# EAGLE board connectorvAudio (EAGLE 5.11)
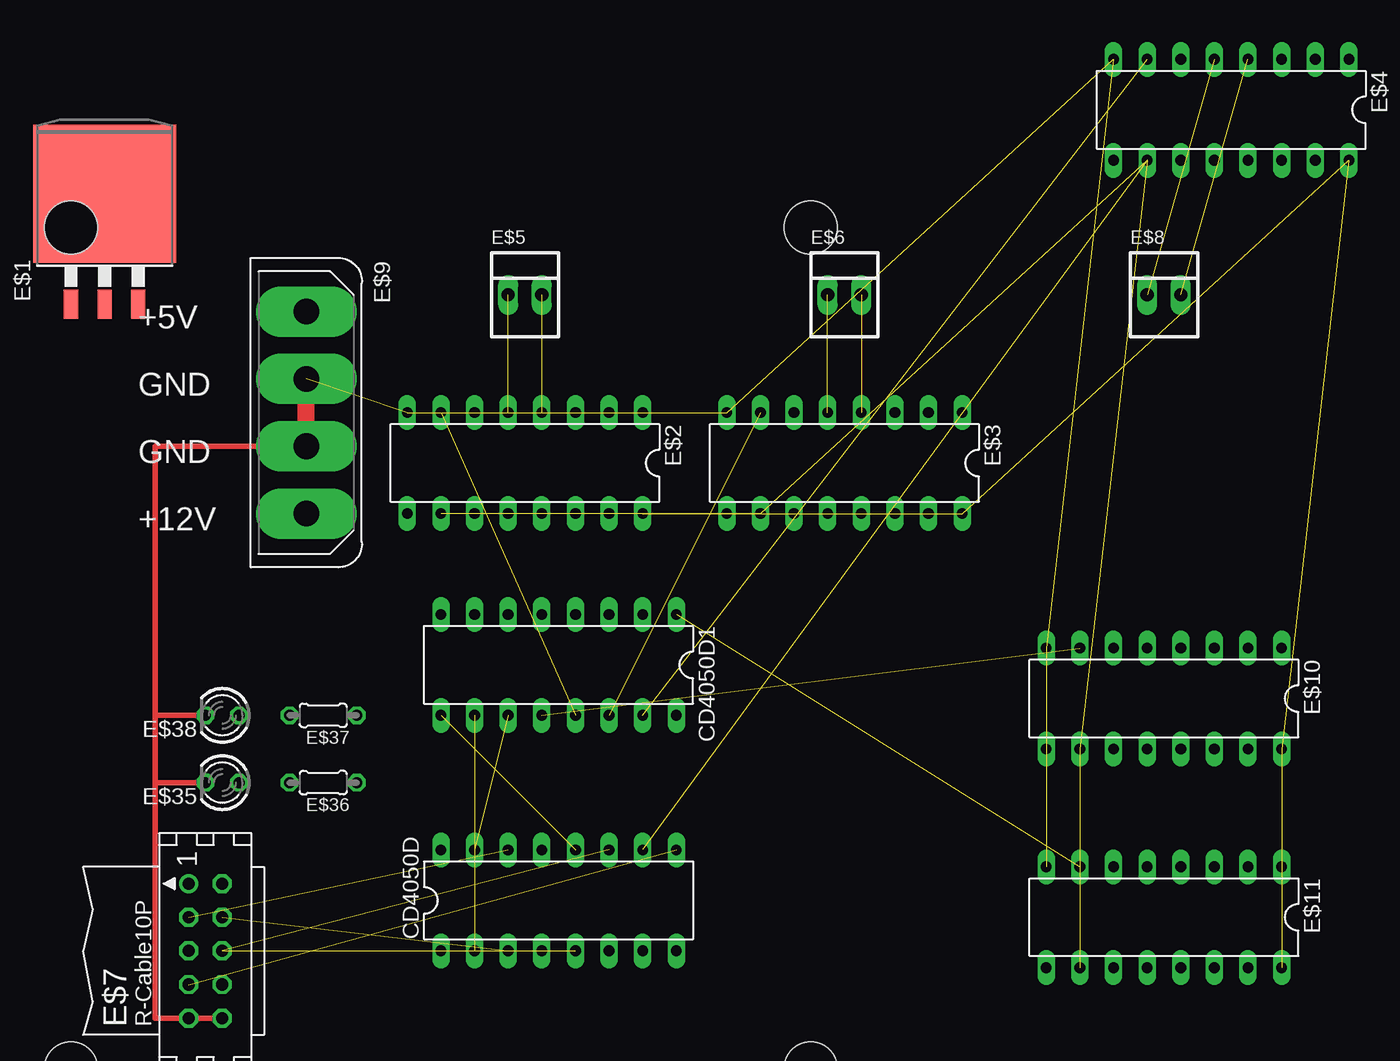
[diagram p0: board, top side]
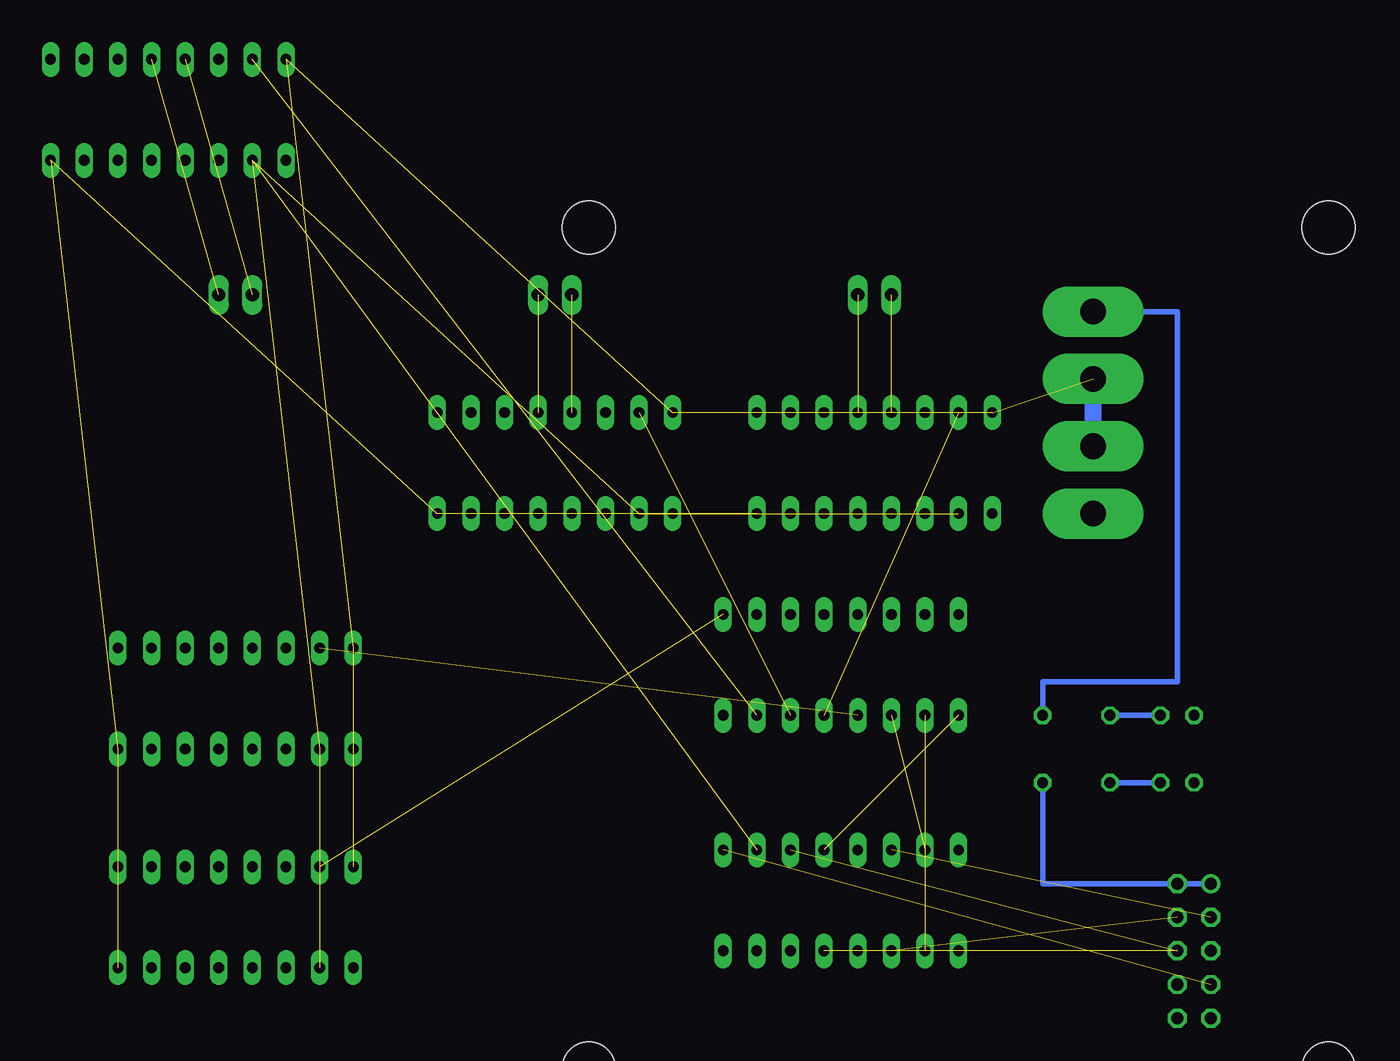
[diagram p1: board, bottom side, seen from below]

No outline drawn. Coordinates in mm, seen from the top.
Copper layers (1*16): Top 0.035mm / dielectric 1.5mm / Bottom 0.035mm
Design rules "default": minimum track width 10mil, minimum drill 24mil, track to track 8mil, track to pad 8mil, pad to pad 8mil, via to via 8mil, smd to smd 8mil, copper to edge 40mil, drill to drill 8mil, minimum pad ring 10mil, minimum via ring 8mil, stop-mask expansion 4mil, vias tented up to drill 0mil, thermal gap 10mil
Net classes: 1 Power: width 0.003 mm
Holes 4 mm at 59.69,67.31 59.69,3.81 3.81,3.81 3.81,67.31
vRestrict: area 0,0 to 63.5,71.1

## Footprints (pad centres in the part's own frame; a part is rotated, then mirrored left to right if it is on the bottom)
DIL16 = drill 0.813 long: 1 -8.89,-3.81; 2 -6.35,-3.81; 3 -3.81,-3.81; 4 -1.27,-3.81; 5 1.27,-3.81; 6 3.81,-3.81; 7 6.35,-3.81; 8 8.89,-3.81; 9 8.89,3.81; 10 6.35,3.81; 11 3.81,3.81; 12 1.27,3.81; 13 -1.27,3.81; 14 -3.81,3.81; 15 -6.35,3.81; 16 -8.89,3.81
TO263-3 = smd 1.067 x 2.159: 1 -2.54,-5.791; 2 0,-5.791; 3 2.54,-5.791 | smd 10.8 x 10.41: TAB 0,2.54
22-23-2021 = drill 1 long: 1 -1.27,0; 2 1.27,0
CON10L = drill 0.914 round: 1 5.08,1.27 | drill 0.914 octagon: 2 5.08,-1.27; 3 2.54,1.27; 4 2.54,-1.27; 5 0,1.27; 6 0,-1.27; 7 -2.54,1.27; 8 -2.54,-1.27; 9 -5.08,1.27; 10 -5.08,-1.27
FLOPPY-4 = drill 1.93 pad 3.81 long: 1 7.62,0; 2 2.54,0; 3 -2.54,0; 4 -7.62,0
LED3MM = drill 0.813 octagon: A -1.27,0; K 1.27,0
0204/5 = drill 0.813 octagon: 1 -2.54,0; 2 2.54,0

## Placement (x,y rotation side)
CD4050D  CD4050D  [DIL16]  40.64,16.51 0 top
CD4050D1  MC14051BCP  [DIL16]  40.64,34.29 180 top
E$1  LM3940IS-3.3  [TO263-3]  6.35,67.31 0 top
E$2  [DIL16]  38.1,49.53 180 top
E$3  [DIL16]  62.23,49.53 180 top
E$4  [DIL16]  91.44,76.2 180 top
E$5  [22-23-2021]  38.1,62.23 0 top
E$6  [22-23-2021]  62.23,62.23 0 top
E$7  [CON10L]  13.97,12.7 90 top
E$8  [22-23-2021]  86.36,62.23 0 top
E$9  [FLOPPY-4]  21.59,53.34 270 top
E$10  [DIL16]  86.36,31.75 180 top
E$11  [DIL16]  86.36,15.24 180 top
E$35  [LED3MM]  15.24,25.4 180 top
E$36  1k  [0204/5]  22.86,25.4 180 top
E$37  1k  [0204/5]  22.86,30.48 180 top
E$38  [LED3MM]  15.24,30.48 180 top

## Library data of the parts
CD4050D CD4050D1 E$2-E$4 E$10 E$11 = 40xx
E$1 = linear
E$5 E$6 E$8 = con-molex
E$7 = con-harting
E$9 = con-amp
E$35 E$38 = led
E$36 E$37 = rcl

## Nets
S$1: CD4050D.14 E$7.3
S$2: CD4050D.3 E$7.4
S$3 [Power]: E$9.4 E$37.1
S$4: CD4050D1.11 CD4050D.15
S$5: CD4050D.5 CD4050D.11 E$7.6
S$6: CD4050D.9 E$7.7
S$7: CD4050D1.10 CD4050D.2
S$8: CD4050D1.9 CD4050D.12
S$9: E$2.8 E$3.8 E$4.8 E$7.9 E$7.10 E$9.2 E$9.3 E$10.8 E$11.8 E$35.K E$38.K
S$10: E$2.5 E$5.1
S$11: E$2.4 E$5.2
S$12: E$3.5 E$6.1
S$13: E$3.4 E$6.2
S$15: E$4.5 E$8.1
S$16: E$4.4 E$8.2
S$17: E$2.16 E$3.16 E$4.16 E$10.16 E$11.16
S$18: CD4050D.10 E$2.10 E$3.10 E$4.10 E$10.10 E$11.10
S$19: CD4050D1.13 E$2.7
S$20: CD4050D1.14 E$3.7
S$21: CD4050D1.15 E$4.7
S$22: CD4050D1.12 E$10.7
S$23: CD4050D1.1 E$11.7
S$34: E$7.1 E$7.2 E$36.1
S$35: E$35.A E$36.2
S$36: E$37.2 E$38.A

## Tracks (layer width: path | path; a pad name or v marks a point on that pad's centre or on a via)
S$1  (1 unrouted)
S$2  (1 unrouted)
S$3
  Bottom 0.406: E$9.4 15.24,60.96 15.24,33.02 25.4,33.02 E$37.1
S$4  (1 unrouted)
S$5  (2 unrouted)
S$6  (1 unrouted)
S$7  (1 unrouted)
S$8  (1 unrouted)
S$9  (5 unrouted)
  Top 0.406: E$9.2 10.16,50.8 10.16,30.48 | 10.16,30.48 E$38.K | 10.16,25.4 10.16,30.48 | 10.16,25.4 E$35.K | E$7.10 E$7.9 10.16,7.62 10.16,25.4
  Top 1.27: E$9.2 E$9.3
  Bottom 1.27: E$9.2 E$9.3
S$10  (1 unrouted)
S$11  (1 unrouted)
S$12  (1 unrouted)
S$13  (1 unrouted)
S$15  (1 unrouted)
S$16  (1 unrouted)
S$17  (4 unrouted)
S$18  (5 unrouted)
S$19  (1 unrouted)
S$20  (1 unrouted)
S$21  (1 unrouted)
S$22  (1 unrouted)
S$23  (1 unrouted)
S$34
  Bottom 0.406: E$7.1 E$7.2 25.4,17.78 E$36.1
S$35
  Bottom 0.406: E$35.A E$36.2
S$36
  Bottom 0.406: E$38.A E$37.2

## Text on the board
tPlace: +5V | GND | GND | +12V